# Altium PCB Lite Carrier for Mu.PcbDoc (part 8 of 15)
Units mm, origin at the board's own origin, x right, y up, seen from the top; angles counter-clockwise.
Board outline 146 x 102 mm, 20 copper layers (F.Cu, F.Mask, B.Cu, B.Mask, In1.Cu, F.SilkS, In2.Cu, B.SilkS, F.Adhes, B.Adhes, F.Paste, B.Paste, Dwgs.User, Cmts.User, Eco1.User, Eco2.User, Edge.Cuts, Margin, B.CrtYd, F.CrtYd); 254 components, 382 nets, 1258 pads, 1020 vias.
Unrouted connection lines stored in the file: 113.
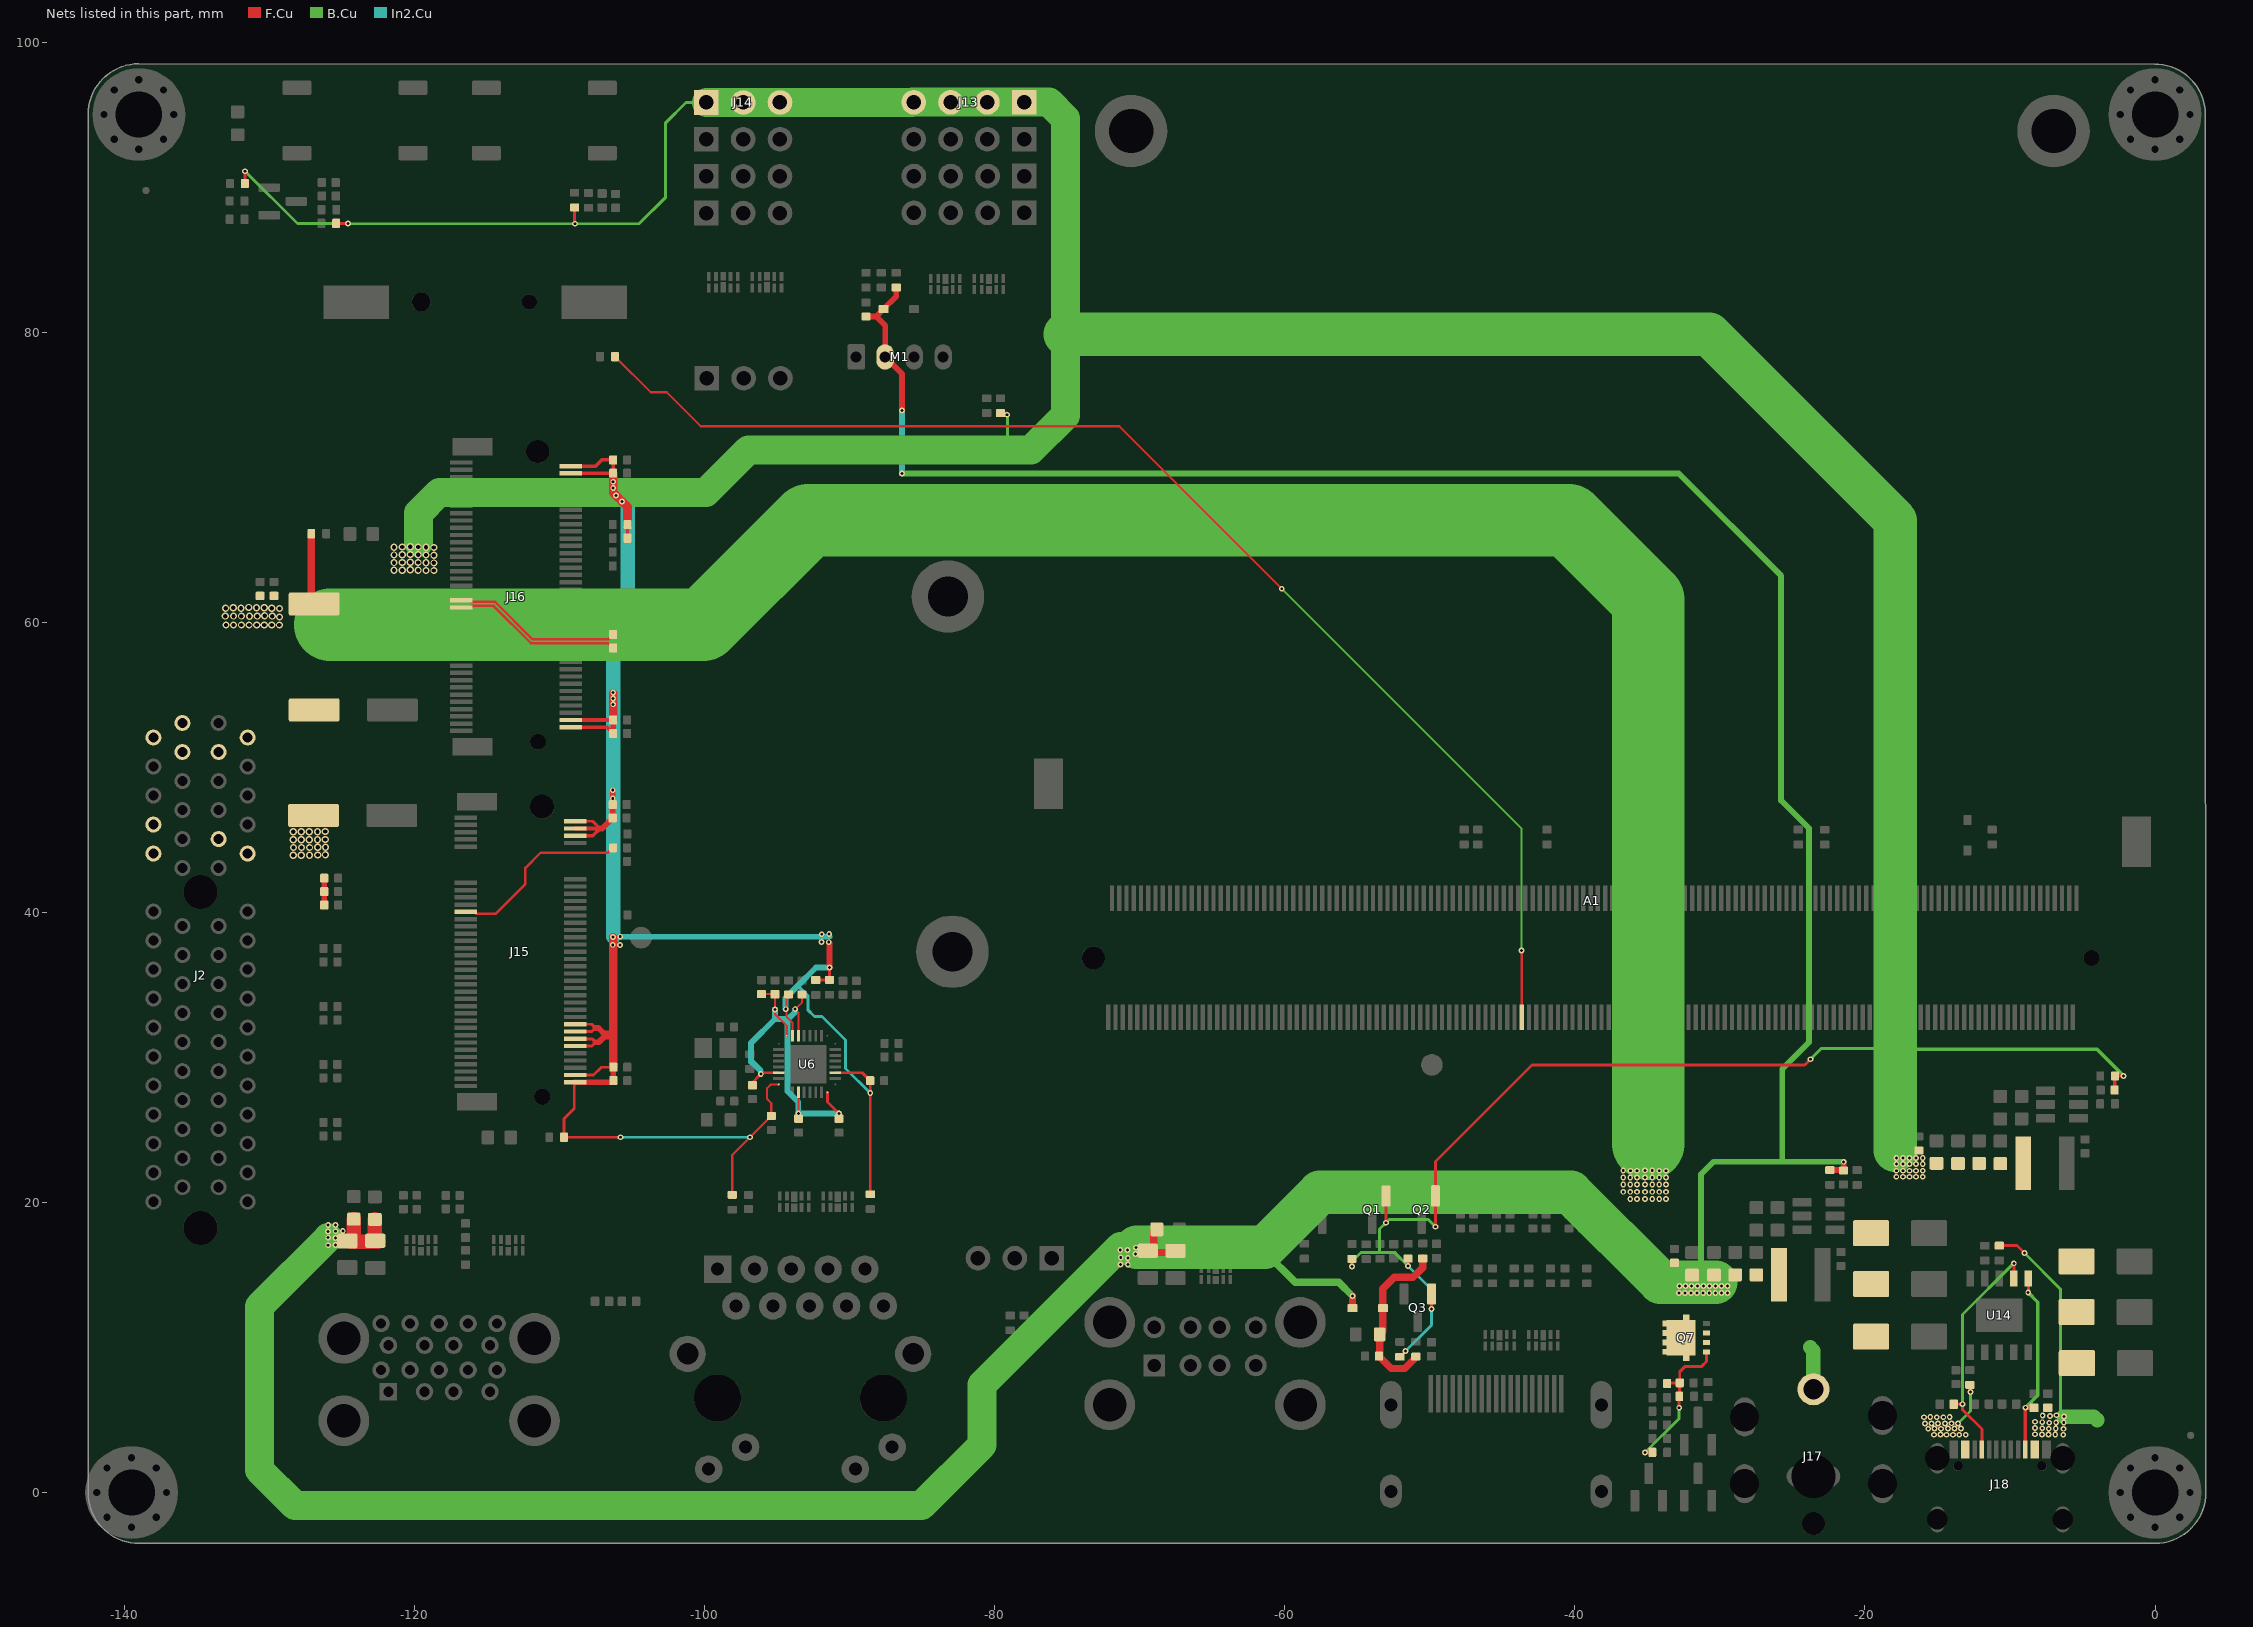
[diagram p18: the nets of this part, all layers, seen from the top]

## Via types
v1: diameter 0.4, hole 0.2, F.Cu to B.Cu, tented both sides, 952 vias
v2: diameter 0.5, hole 0.3, F.Cu to B.Cu, tented both sides, 68 vias

## Nets (pads, with @x,y where several pads share a name; then routed paths per layer and width w, separated by ;. In a path a pad name is that pad's centre, name@x,y a point inside that pad or via, vN(x,y) a via of type N, cw(c..) or ccw(c..) an arc to the next point about the centre after c; other vN are vias at no path point) (continued)
+3V3: (continued)
  In2.Cu w0.6: v1(-106.33,48.42) -106.3,48.45 -106.3,49.02 ; v1(-106.3,54.34) v1(-106.3,55.16) -106.3,56.16 ; v1(-106.3,69.68) -106.3,68.93 v1(-106.115,68.745) -105.31,67.94
  In2.Cu w1: -106.3,38.32 -106.3,49.02 -106.3,56.16 -106.3,60.33 -105.31,61.32 -105.31,67.94
  other v1: -17.84,21.77 -17.385,21.77 -16.93,21.77 -16.475,21.77 -16.02,21.77 -17.84,22.18 -17.385,22.18 -16.93,22.18 -16.475,22.18 -16.02,22.18 -17.84,22.64 -17.385,22.64 -16.93,22.64 -16.475,22.64 -16.02,22.64 -17.84,23.06 -17.385,23.06 -16.93,23.06 -16.475,23.06 -16.02,23.06 -105.84,37.75 -106.33,37.76 -91.93,37.95 -106.32,38.3 -91.92,38.49 -91.41,38.51
  other v2: -128.35,43.94 -127.8,43.94 -127.24,43.94 -126.67,43.95 -126.14,43.96 -128.34,44.47 -127.79,44.47 -127.23,44.47 -126.66,44.48 -126.13,44.49 -128.36,45 -127.81,45 -127.25,45 -126.68,45.01 -126.15,45.02 -128.36,45.55 -127.81,45.55 -127.25,45.55 -126.68,45.56 -126.15,45.57 -118.66,63.56 -121.41,63.58 -120.85,63.59 -119.75,63.59 -119.2,63.57 -120.29,63.61 -118.66,64.09 -121.41,64.11 -120.85,64.12 -119.75,64.12 -119.2,64.1 -120.29,64.14 -119.2,64.63 -118.66,64.62 -121.41,64.64 -120.85,64.65 -119.75,64.65 -120.29,64.67 -119.2,65.16 -118.66,65.15 -121.41,65.17 -120.85,65.18 -119.75,65.18 -120.29,65.2
+5V: C30.2 C31.2 C32.2 C72.1 C74.2 C76.2 C78.1 C80.2 C82.2 C84.1 D4.2 D26.1 F2.1 F3.1 F4.1 F5.1 L1.2 M1.2 R57.2 R72.1 TP5.1 | length 288.5
  F.Cu w0.4: C84.1@-88.87,81.08 -88.17,81.08 ; R72.1@-86.79,83.07 -86.79,82.46 D26.1@-87.66,81.59 -88.17,81.08 ; v1(-86.38,74.59) -86.38,77.12 M1.2@-87.55,78.29 -87.55,80.46 -88.17,81.08 ; R57.2@-22.42,22.23 -21.51,22.23 C72.1@-21.48,22.2 -21.47,22.21 v1(-21.47,22.8)
  F.Cu w0.5: C30.2@-69.025,17.98 -69.025,16.57 -69,16.545 F2.1@-67.53,16.545
  F.Cu w0.508: D4.2@-55.335,12.71 v1(-55.335,13.55)
  F.Cu w1: C31.2@-124.19,18.845 -124.19,17.492 -124.4,17.283 -122.5,17.283 -122.73,17.512 C32.2@-122.73,18.835
  B.Cu w0.4: v1(-86.38,70.26) -32.845,70.26 -25.78,63.195 -25.78,47.709 -23.86,45.79 -23.86,31.04 -25.71,29.19 -25.71,22.8 ; -31.31,14.5 -31.31,21.94 -30.45,22.8 -25.71,22.8 ; v1(-21.47,22.8) -25.71,22.8
  B.Cu w0.508: -61.37,16.91 -61.37,16.585 -59.285,14.5 -56.285,14.5 v1(-55.335,13.55)
  B.Cu w2: v1(-125.95,17.57) -130.68,12.84 -130.68,1.54 -128.24,-0.9 -85.04,-0.9 -80.87,3.27 -80.87,7.43 -71.34,16.96 v1(-71.34,16.73)
  B.Cu w3: v1@-70.21,16.91 -61.37,16.91 -57.59,20.69 -40.29,20.69 -34.1,14.5 -31.31,14.5 -30.3,14.5
  In2.Cu w0.4: v1(-86.38,70.26) v1(-86.38,74.59)
  other v1: -32.831,13.75 -32.413,13.75 -31.994,13.75 -31.575,13.75 -31.156,13.75 -30.738,13.75 -30.319,13.75 -29.9,13.75 -29.481,13.75 -32.786,14.24 -32.373,14.24 -31.959,14.24 -31.545,14.24 -31.131,14.24 -30.718,14.24 -30.304,14.24 -29.89,14.24 -29.476,14.24 -70.82,15.71 -71.32,15.72 -70.82,16.17 -71.31,16.2 -70.29,16.45 -70.85,16.71 -70.27,16.88 -125.95,17.05 -125.44,17.06 -125.45,17.54 -125.96,18 -125.43,18.01 -124.94,18.03 -125.95,18.44 -125.44,18.44
+12V: C63.2 D15.2 D16.2 D17.2 J17.1 Q7.1 Q7.2 Q7.3 R38.2 R40.2 R44.2 TP4.1 | length 14.2
  F.Cu w0.2: v1(-35.16,2.752) -35.14,2.772 R38.2@-34.66,2.772 ; R40.2@-33.64,7.522 -33.6,7.562 C63.2@-32.77,7.562 ; v1(-32.81,5.843) -32.81,6.622 R44.2@-32.8,6.632 -32.8,7.532 C63.2@-32.77,7.562 ; Q7.1@-30.92,9.7 -30.92,9.04 -31.26,8.7 -32.39,8.7 -32.77,8.32 C63.2@-32.77,7.562
  B.Cu w0.2: v1(-35.16,2.752) -32.81,5.102 v1(-32.81,5.843)
  B.Cu w0.4: J17.1@-23.75,6.75 J17.1@-23.75,7.24
  B.Cu w1: TP4.1@-23.78,10 -23.55,9.77 J17.1@-23.55,7.11
+12VA: C9.1 C10.1 C11.1 C12.1 J2.A2 J2.A3 J2.B1 J2.B2 J2.B3 Q7.5 Q7.6 Q7.7 Q7.8 Q7.9 Q7.10 Q7.11 R54.1 TP8.1 | length 138.5
  F.Cu w0.5: R54.1@-127.11,66.1 -127.11,61.45 C11.1@-126.92,61.26
  B.Cu w5: -125.79,59.81 -100.08,59.81 -92.85,67.04 -40.43,67.04 -34.94,61.55 TP8.1@-34.94,24.06
  other v1: -36.186,20.243 -35.726,20.243 -35.166,20.243 -34.666,20.243 -34.186,20.243 -33.726,20.243 -36.666,20.729 -36.186,20.729 -35.726,20.729 -35.166,20.729 -34.666,20.729 -34.186,20.729 -33.726,20.729 -36.666,21.235 -36.186,21.235 -35.726,21.235 -35.166,21.235 -34.666,21.235 -34.186,21.235 -33.726,21.235 -36.666,21.721 -36.186,21.721 -35.726,21.721 -35.166,21.721 -34.666,21.721 -34.186,21.721 -33.726,21.721 -36.176,22.186 -35.726,22.186 -34.186,22.186 -33.726,22.186 -36.666,22.206 -35.166,22.212 -34.666,22.206
  other v2: -132.99,59.81 -132.48,59.81 -131.93,59.81 -131.4,59.81 -130.88,59.81 -130.35,59.81 -129.83,59.81 -129.31,59.81 -129.3,60.36 -131.37,60.41 -133.04,60.42 -132.48,60.42 -131.93,60.42 -130.84,60.42 -130.33,60.44 -129.81,60.42 -133.02,60.97 -131.957,60.97 -129.831,60.97 -129.3,60.95 -132.489,60.99 -130.894,61 -130.363,60.99 -131.426,61.02
+15V: D12.1 D18.2 D19.2 D20.2 J18.A4 J18.A9 J18.B4 J18.B9 R36.1 R37.1 TP3.1 | length 19.7
  F.Cu w0.2: R37.1@-12.75,7.44 -12.75,6.97 v1(-12.72,6.94) ; R36.1@-10.74,17.02 -9.52,17.02 v1(-9.01,16.51)
  B.Cu w0.2: v1(-13.59,4.76) -12.72,5.63 v1(-12.72,6.94) ; v1(-9.01,16.51) -6.534,14.034 -6.534,5.586 v1(-6.79,5.33)
  B.Cu w1: v1(-6.29,5.24) -4.24,5.24 TP3.1@-4,5
  other v1: -15.24,3.98 -14.8,3.99 -14.37,3.98 -13.94,3.98 -13.5,3.98 -13.05,3.98 -7.35,3.99 -6.88,3.99 -6.33,3.98 -8.28,4.02 -7.79,4.01 -15.64,4.4 -14.75,4.4 -7.33,4.4 -6.32,4.39 -15.2,4.41 -14.27,4.41 -13.83,4.42 -13.38,4.41 -7.78,4.43 -6.85,4.41 -8.275,4.441 -15.86,4.75 -15.42,4.76 -14.97,4.75 -14.48,4.76 -14.04,4.77 -7.3,4.81 -6.82,4.83 -6.3,4.82 -7.78,4.85 -8.28,4.88 -15.94,5.19 -15.05,5.19 -14.6,5.19 -15.5,5.2 -14.16,5.2 -7.25,5.28 -7.75,5.3
+BATT: A1.115 R1.1 | length 89
  F.Cu w0.15: R1.1@-106.18,78.31 -103.72,75.85 -102.61,75.85 -100.27,73.51 -71.41,73.51 v1(-60.21,62.31) ; v1(-43.67,37.36) -43.665,37.355 A1.115@-43.665,32.76
  B.Cu w0.15: v1(-60.21,62.31) -43.67,45.77 v1(-43.67,37.36)
CC1: D13.1 J18.A5 U14.7 | length 16.5
  F.Cu w0.2: D13.1@-13.885,6.09 v1(-13.27,6.09) -13.27,5.7 -11.94,4.37 J18.A5@-11.94,2.955 ; U14.7@-9.74,14.77 v1(-9.74,15.8)
  B.Cu w0.2: v1(-13.27,6.09) -13.27,12.27 v1(-9.74,15.8)
CC2: D14.1 J18.B5 U14.6 | length 13
  F.Cu w0.2: v1(-8.75,13.79) -8.74,13.8 U14.6@-8.74,14.77
  F.Cu w0.25: J18.B5@-8.94,2.955 -8.94,5.84 v1(-8.93,5.85) -8.91,5.83 D14.1@-8.345,5.83
  B.Cu w0.25: v1(-8.93,5.85) -8.08,6.7 -8.08,13.12 v1(-8.75,13.79)
CON_PCIE_TX_0+: C55.2 J16.35 | length 11.7
  F.Cu w0.17: J16.35@-116.77,61.01 -116.145,61.01 -116.031,61.124 -114.546,61.124 -111.971,58.549 -106.659,58.549 -106.33,58.22 C55.2@-106.3,58.22
CON_PCIE_TX_0-: C56.2 J16.37 | length 11.7
  F.Cu w0.17: J16.37@-116.77,61.51 -116.145,61.51 -116.031,61.396 -114.434,61.396 -111.859,58.821 -106.659,58.821 -106.33,59.15 C56.2@-106.3,59.15
CON_PCIE_TX_1+: C49.2 J15.49 | length 12.7
  F.Cu w0.17: J15.49@-116.47,40.03 -115.845,40.03 -115.731,39.916 -114.386,39.916 -112.356,41.946 -112.356,43.056 -111.296,44.116 -106.664,44.116 -106.33,44.45 C49.2@-106.3,44.45